# EAGLE board ACM_HotswapMultiboard (EAGLE 9.2.1)
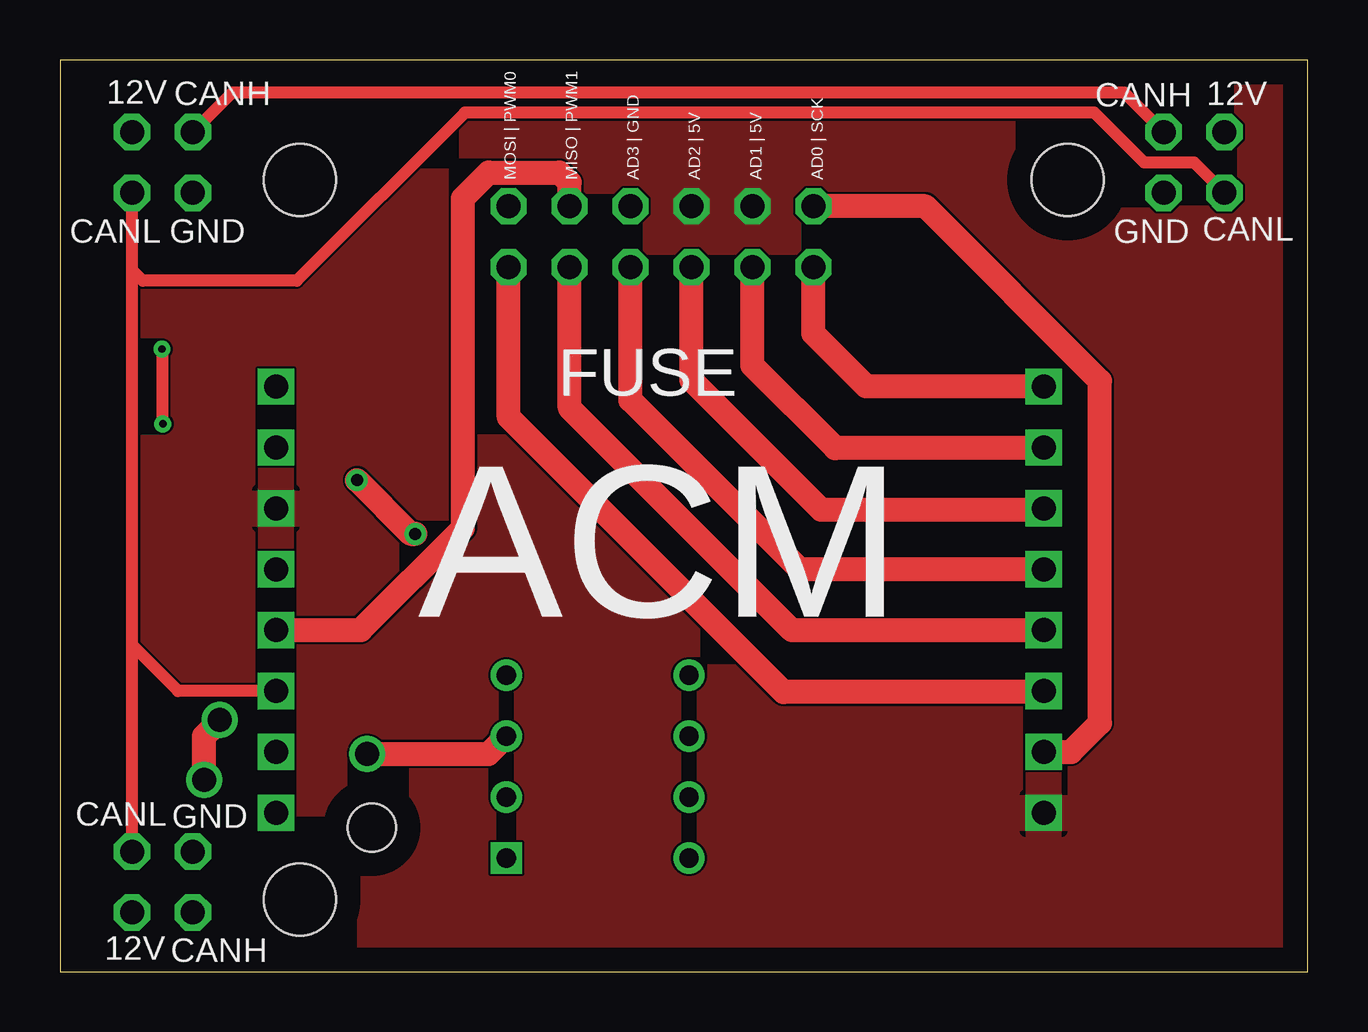
[diagram p0: board, top side]
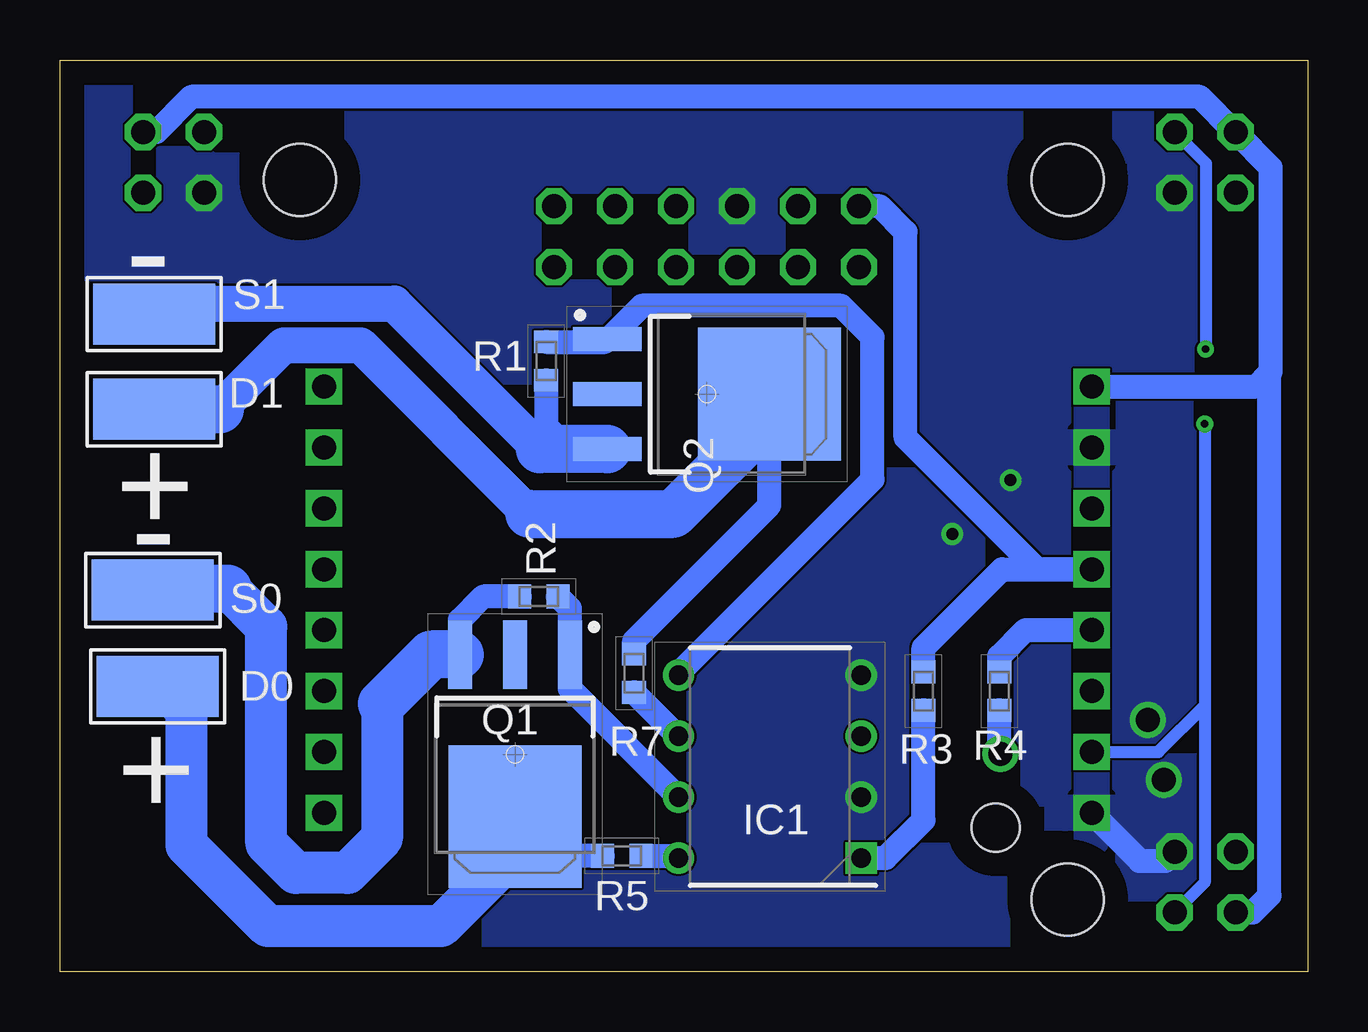
[diagram p1: board, bottom side, seen from below]

Size 52 x 38 mm. Coordinates in mm from the lower left corner, seen from the top.
Outline: 0,0 52,0 52,38 0,38 0,0
Copper layers (1*16): Top 0.035mm / dielectric 1.53mm / Bottom 0.035mm
Design rules "default *": minimum track width 3.5mil, minimum drill 0.2mm, track to track 3.5mil, track to pad 3.5mil, pad to pad 5mil, via to via 5mil, smd to smd 3.5mil, copper to edge 40mil, drill to drill 6mil, minimum pad ring 10mil, minimum via ring 8mil, stop-mask expansion 4mil, vias tented up to drill 0mil, thermal gap 10mil
Holes 2 mm at 13,6
Holes 3 mm at 10,3 42,33 10,33

## Footprints (pad centres in the part's own frame; a part is rotated, then mirrored left to right if it is on the bottom)
5-2,5 = smd 2.54 x 5.08: 1 0,0
DIP762W60P254L966H485Q8N = drill 0.8 pad 1.2 square: 1 -3.81,3.81 | drill 0.8 pad 1.2: 2 -3.81,1.27; 3 -3.81,-1.27; 4 -3.81,-3.81; 5 3.81,-3.81; 6 3.81,-1.27; 7 3.81,1.27; 8 3.81,3.81
TO229P990X238-4N = smd 2.85 x 1: 1 -4.15,2.29; 2 -4.15,0; 3 -4.15,-2.29 | smd 5.95 x 5.55: 4 2.6,0
RESC1608X55N = smd 0.95 x 1: 1 -0.8,0; 2 0.8,0
ACM_CAS_FP = drill 1 square: 5V1_P 32,3.61; 5V_P 0,16.31; 12V_P 0,21.39; CANH_P 0,6.15; CANL_P 0,8.69; GND0_P 0,18.85; GND1_P 0,3.61; I/O_AD0_P 32,21.39; I/O_AD1_P 32,18.85; I/O_AD2_SDA_P 32,16.31; I/O_AD3_SCL_P 32,13.77; MISO_P 32,11.23; MOSI_P 32,8.69; PWM0_P 0,13.77; PWM1_INT1_P 0,11.23; SCK_P 32,6.15
16P_CONNECTOR_FP = drill 1 octagon: 1 0,0; 2 2.54,0; 3 5.08,0; 4 7.62,0; 5 10.16,0; 6 12.7,0; 7 0,-2.54; 8 2.54,-2.54; 9 5.08,-2.54; 10 7.62,-2.54; 11 10.16,-2.54; 12 12.7,-2.54
16P_CONNECTOR_FP' = drill 1 octagon: 1 0,0; 2 2.54,0; 3 0,-2.54; 4 2.54,-2.54

## Placement (x,y rotation side)
D0  [5-2,5]  47.92,11.89 270 bottom
D1  [5-2,5]  48.08,23.44 90 bottom
IC1  Optocoupler DIP  [DIP762W60P254L966H485Q8N]  22.41,8.54 180 bottom
Q1  [TO229P990X238-4N]  33.04,9.06 270 bottom
Q2  [TO229P990X238-4N]  25.03,24.07 0 bottom
R1  [RESC1608X55N]  31.73,25.45 270 bottom
R2  [RESC1608X55N]  32.04,15.63 180 bottom
R3  200 Ohm  [RESC1608X55N]  16.01,11.69 90 bottom
R4  200 Ohm  [RESC1608X55N]  12.85,11.69 90 bottom
R5  1K Ohm  [RESC1608X55N]  28.58,4.82 180 bottom
R7  1K Ohm  [RESC1608X55N]  28.07,12.44 90 bottom
S0  [5-2,5]  48.13,15.9 90 bottom
S1  [5-2,5]  48.08,27.41 90 bottom
U$1  ACM_CASTELLATED  [ACM_CAS_FP]  9,3 0 top
U$2  16P_CONNECTOR  [16P_CONNECTOR_FP]  18.7,31.9 0 top
U$3  16P_CONNECTOR  [16P_CONNECTOR_FP']  3,35 0 top
U$4  16P_CONNECTOR  [16P_CONNECTOR_FP']  46,35 0 top
U$5  16P_CONNECTOR  [16P_CONNECTOR_FP']  3,5 0 top

## Library data of the parts
D0 D1 S0 S1 = wirepad
IC1 = TLP350(F); DESCRIPTION: Toshiba TLP350(F) DC Input Optocoupler, Through Hole, 8-Pin PDIP; HEIGHT: 4.85mm; MANUFACTURER_NAME: Toshiba; MANUFACTURER_PART_NUMBER: TLP350(F); MOUSER_PART_NUMBER: 757-TLP350(F); MOUSER_PRICE-STOCK: https://www.mouser.com/Search/Refine.aspx?Keyword=757-TLP350%28F%29; RS_PART_NUMBER: 0186022P; RS_PRICE-STOCK: http://uk.rs-online.com/web/p/products/0186022P
Q1 Q2 = NGD8201ANT4G_Mosfet; ALLIED_NUMBER: 70341208; ALLIED_PRICE-STOCK: http://www.alliedelec.com/on-semiconductor-ngd8201ant4g/70341208/; HEIGHT: 2.38mm; MANUFACTURER_NAME: ON Semiconductor; MANUFACTURER_PART_NUMBER: NGD8201ANT4G; MOUSER_PART_NUMBER: 7470901; MOUSER_PRICE-STOCK: http://uk.rs-online.com/web/p/products/7470901; RS_PART_NUMBER: 7470901; RS_PRICE-STOCK: http://uk.rs-online.com/web/p/products/7470901
R1-R5 R7 = ERA-3AEB2262V(0603 Resistor); DESCRIPTION: Thin Film Resistors - SMD 0603 22.6Kohm 0.1% 25ppm; HEIGHT: 0.55mm; MANUFACTURER_NAME: Panasonic; MANUFACTURER_PART_NUMBER: ERA-3AEB2262V; MOUSER_PART_NUMBER: 667-ERA-3AEB2262V; MOUSER_PRICE-STOCK: https://www.mouser.com/Search/Refine.aspx?Keyword=667-ERA-3AEB2262V
U$1 = ACM_Pindown
U$2 = 12P_Connector holes
U$3-U$5 = 4P_Connector holes

## Nets
5V: U$1.5V1_P U$1.5V_P U$2.4 U$2.5
12V: U$1.12V_P U$3.1 U$4.2 U$5.3
AD0: U$1.I/O_AD0_P U$2.12
AD1: U$1.I/O_AD1_P U$2.11
AD2: U$1.I/O_AD2_SDA_P U$2.10
AD3: U$1.I/O_AD3_SCL_P U$2.9
CANH: U$1.CANH_P U$3.2 U$4.1 U$5.4
CANL: U$1.CANL_P U$3.3 U$4.4 U$5.1
DRAIN0: D0.1 Q1.4 R5.2
DRAIN1: D1.1 Q2.4 R7.2
GATE0: IC1.7 Q1.1 R2.1
GATE1: IC1.5 Q2.1 R1.1
GND: IC1.2 IC1.4 U$1.GND0_P U$1.GND1_P U$2.3 U$3.4 U$4.3 U$5.2
MISO: U$1.MISO_P U$2.8
MOSI: U$1.MOSI_P U$2.7
N$2: IC1.1 R3.1
N$6: IC1.3 R4.1
N$7: IC1.8 R5.1
N$13: IC1.6 R7.1
PWM0: R3.2 U$1.PWM0_P U$2.1
PWM1: R4.2 U$1.PWM1_INT1_P U$2.2
SCK: U$1.SCK_P U$2.6
SOURCE0: Q1.3 R2.2 S0.1
SOURCE1: Q2.3 R1.2 S1.1

## Tracks (layer width: path | path; a pad name or v marks a point on that pad's centre or on a via)
5V
  pour Top: 64,46 64,6 54,-4 -1,-4 -5,0 -5,36 5,46
12V
  Bottom 1: U$5.3 2.29,2.46 1.59,3.16 1.59,24.94 | U$1.12V_P 2.14,24.39 1.59,24.94 | 1.59,24.94 1.53,25 1.53,33.51 3,34.98 U$3.1 3.03,35 4.5,36.47 46.52,36.47 47.99,35 U$4.2
AD0
  Top 1: U$1.I/O_AD0_P 33.61,24.39 31.4,26.6 U$2.12
AD1
  Top 1: U$1.I/O_AD1_P 40.97,21.82 32.31,21.82 28.86,25.27 U$2.11
AD2
  Top 1: U$1.I/O_AD2_SDA_P 40.94,19.25 31.73,19.25 26.32,24.66 U$2.10
AD3
  Top 1: U$1.I/O_AD3_SCL_P 40.98,16.75 30.85,16.75 23.78,23.82 U$2.9
CANH  (via drill 0.3)
  Top 0.5: U$4.1 44.36,36.64 7.18,36.64 U$3.2 | v4.25,25.95 4.25,22.87 v4.29,22.83
  Bottom 0.5: v4.29,22.83 4.29,11.07 | 4.29,11.07 6.21,9.15 U$1.CANH_P | v4.25,25.95 4.23,25.97 4.23,33.69 U$3.2 | 4.29,11.07 4.29,3.71 U$5.4
CANL
  Top 0.5: U$5.1 3,13.61 | 3,13.61 U$3.3 3,29.25 3.45,28.8 9.87,28.8 16.88,35.81 43.1,35.81 45.18,33.73 47.27,33.73 U$4.4 | U$1.CANL_P 4.92,11.69 3,13.61
DRAIN0
  Bottom 1: R5.2 31.4,4.82 Q1.4
  Bottom 1.5: 46.72,10.69 D0.1 | Q1.4 33.04,4.97
  Bottom 1.75: 46.72,10.69 46.72,5.27 43.34,1.89 36.12,1.89 33.04,4.97
DRAIN1
  Bottom 1: R7.2 28.07,13.79 22.43,19.43 Q2.4
  Bottom 1.5: 45.34,23.44 42.67,26.11 39.48,26.11 32.44,19.07
  Bottom 2: D1.1 45.34,23.44 | 32.44,19.07 26.43,19.07 22.43,23.08 Q2.4
GATE0
  Bottom 1: R2.1 30.75,15.14 Q1.1 30.75,11.8 IC1.7
GATE1
  Bottom 1: R1.1 29.29,26.25 Q2.1 29.14,26.36 27.75,27.75 19.45,27.75 18.13,26.44 18.13,20.51 26.22,12.42 IC1.5
GND  (via drill 0.5, 1)
  Top 1: v12.38,20.48 14.62,18.24 v14.81,18.24 | v6,8 6,9.82 v6.66,10.48
  Bottom 1: U$5.2 5.93,4.61 7,4.61 U$1.GND1_P
  pour Bottom: 58,44 58,-7 -8,-7 -8,44
MISO
  Top 1: U$1.MISO_P 30.51,14.22 21.24,23.49 U$2.8
MOSI
  Top 1: U$1.MOSI_P 40.96,11.65 30.16,11.65 18.7,23.11 U$2.7
N$2
  Bottom 1: IC1.1 17.59,4.73 16.01,6.31 R3.1
N$6  (via drill 1)
  Top 1: v12.8,9.07 17.86,9.07 IC1.3
  Bottom 1: v12.8,9.07 12.85,9.12 R4.1
N$7
  Bottom 1: R5.1 26.31,4.82 IC1.8
N$13
  Bottom 1: IC1.6 26.24,9.81 R7.1
PWM0
  Bottom 1: R3.2 16.01,13.49 12.73,16.77 U$1.PWM0_P 11.27,16.77 16.76,22.26 16.76,30.83 17.83,31.9 U$2.1
PWM1
  Top 1: U$1.PWM1_INT1_P 12.54,14.23 16.79,18.48 16.79,32.23 17.87,33.31 20.82,33.31 21.24,32.89 U$2.2
  Bottom 1: R4.2 12.85,13.14 11.76,14.23 U$1.PWM1_INT1_P
SCK
  Top 1: U$1.SCK_P 42.14,9.15 43.35,10.36 43.35,24.62 36.07,31.9 U$2.6
SOURCE0
  Bottom 1: Q1.3 35.33,14.66 34.35,15.63 R2.2
  Bottom 1.75: 38.57,11.17 38.57,5.56 40.02,4.11 42.17,4.11 43.4,5.34 43.4,14.37 44.99,15.96
  Bottom 2: S0.1 48.06,15.96 44.99,15.96 | 38.57,11.17 36.54,13.21 Q1.3
SOURCE1
  Bottom 1: 29.2,21.8 Q2.3 | R1.2 31.73,22.74 30.79,21.8
  Bottom 1.5: 32,21.78 38.07,27.85 47.64,27.85 S1.1
  Bottom 2: 30.79,21.8 29.2,21.8 | Q2.3 32,21.78

## Text on the board
tNames: 12V | CANH | CANH | 12V | MOSI | PWM0 | MISO | PWM1 | AD3 | GND | AD2 | 5V | AD1 | 5V | AD0 | SCK | CANL | GND | GND | CANL | CANL | GND | 12V | CANH
bNames: - | + | - | +